# Altium PCB MainShunt.PcbDoc
Units mm, origin at the board's own origin, x right, y up, seen from the top; angles counter-clockwise.
Board outline 50 x 50.01 mm, 4 copper layers (Top Layer, Layer 1, Layer 2, Bottom Layer), stack 0.637 mm thick; 90 components, 101 nets, 247 pads, 12 vias.
Unrouted connection lines stored in the file: 141.
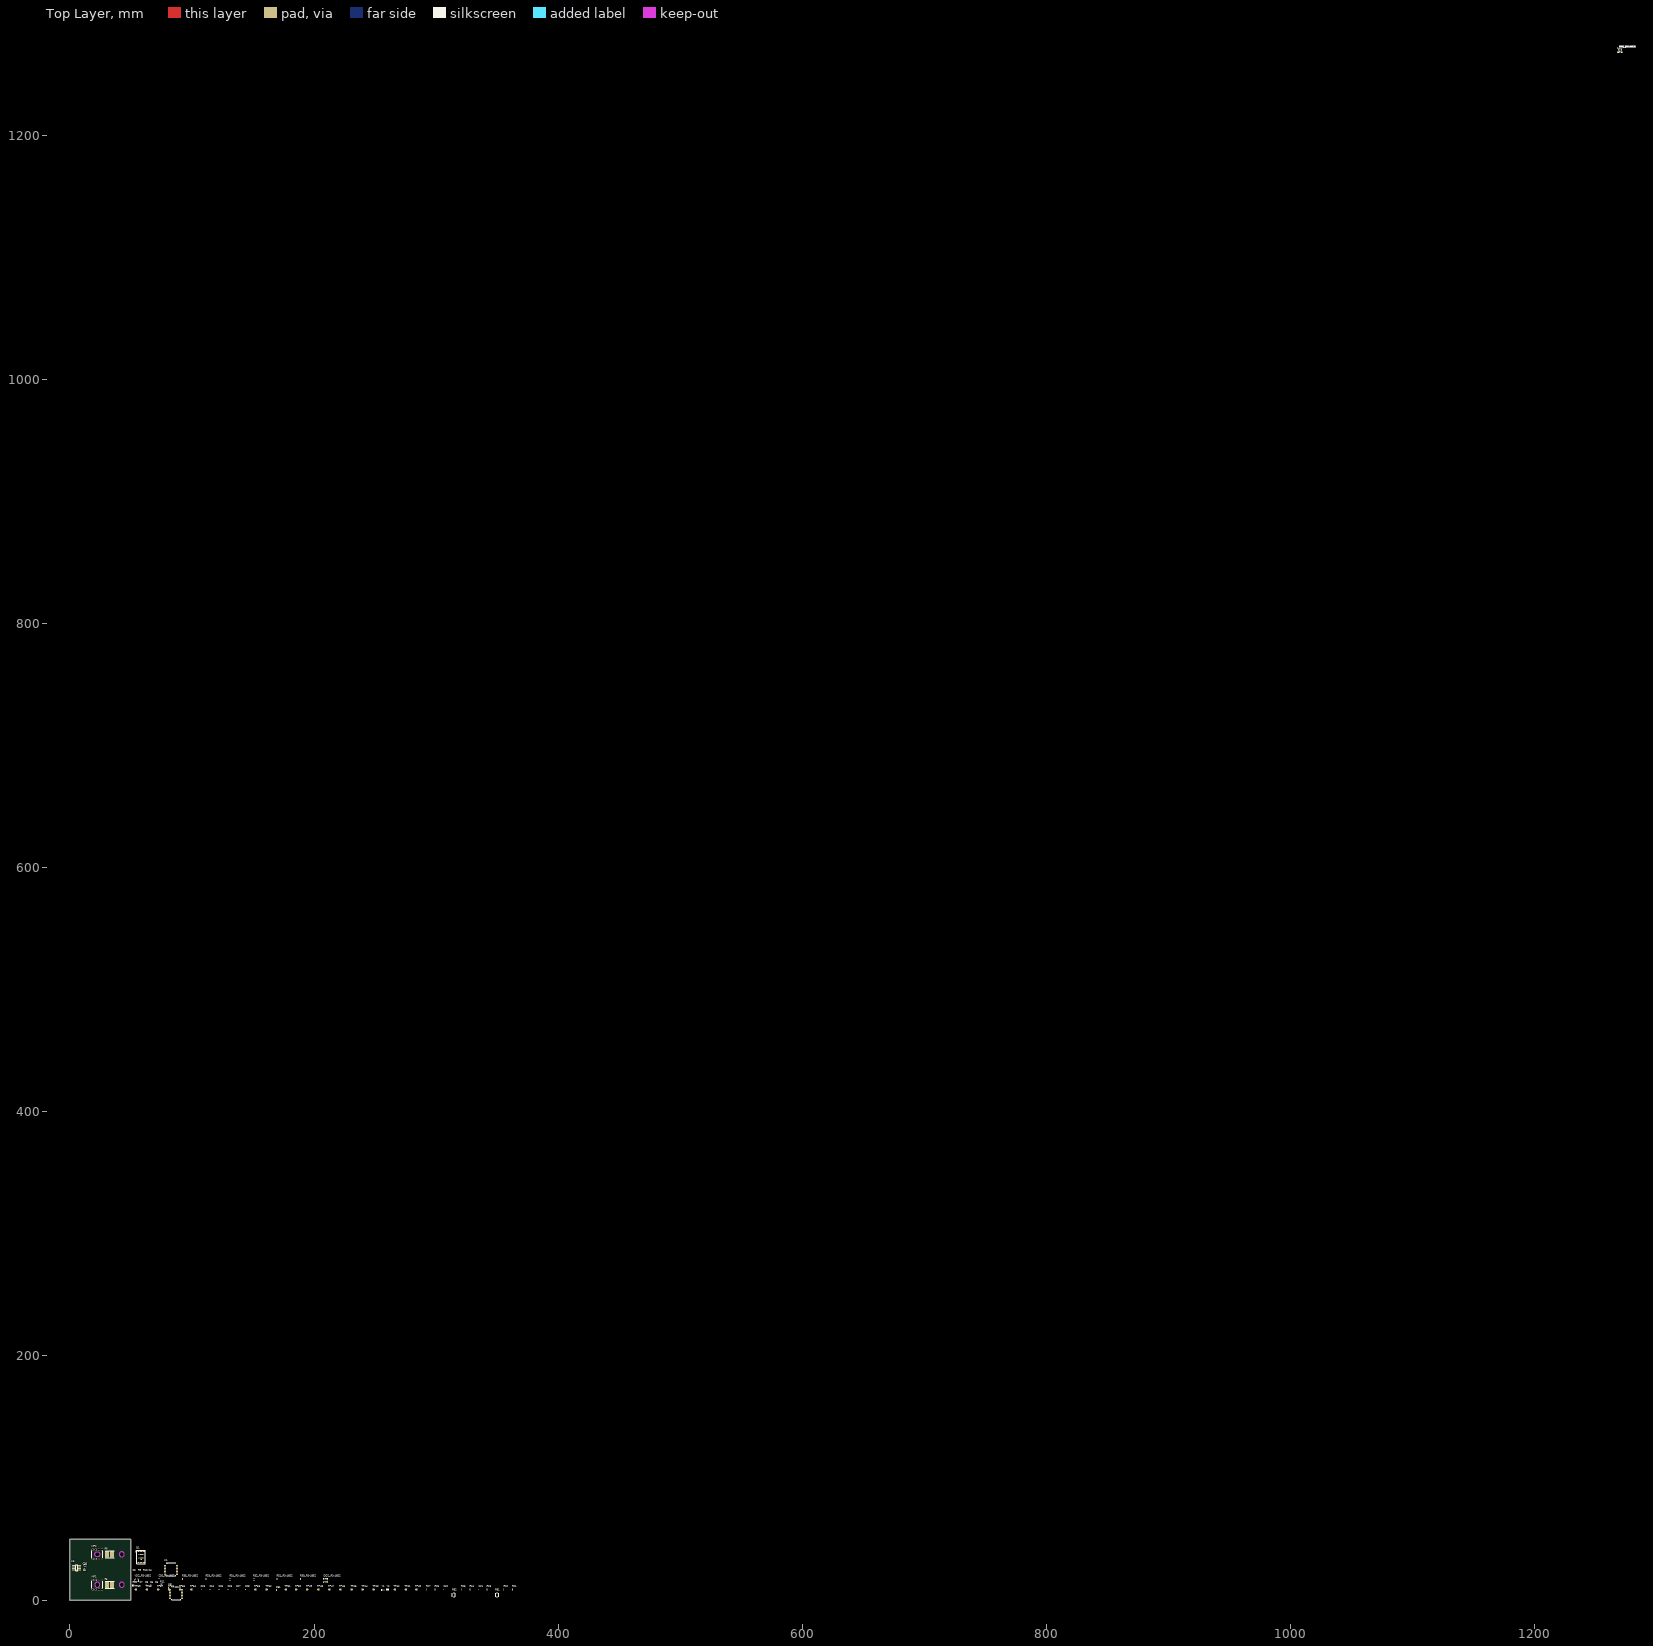
[diagram p0: Top Layer view]
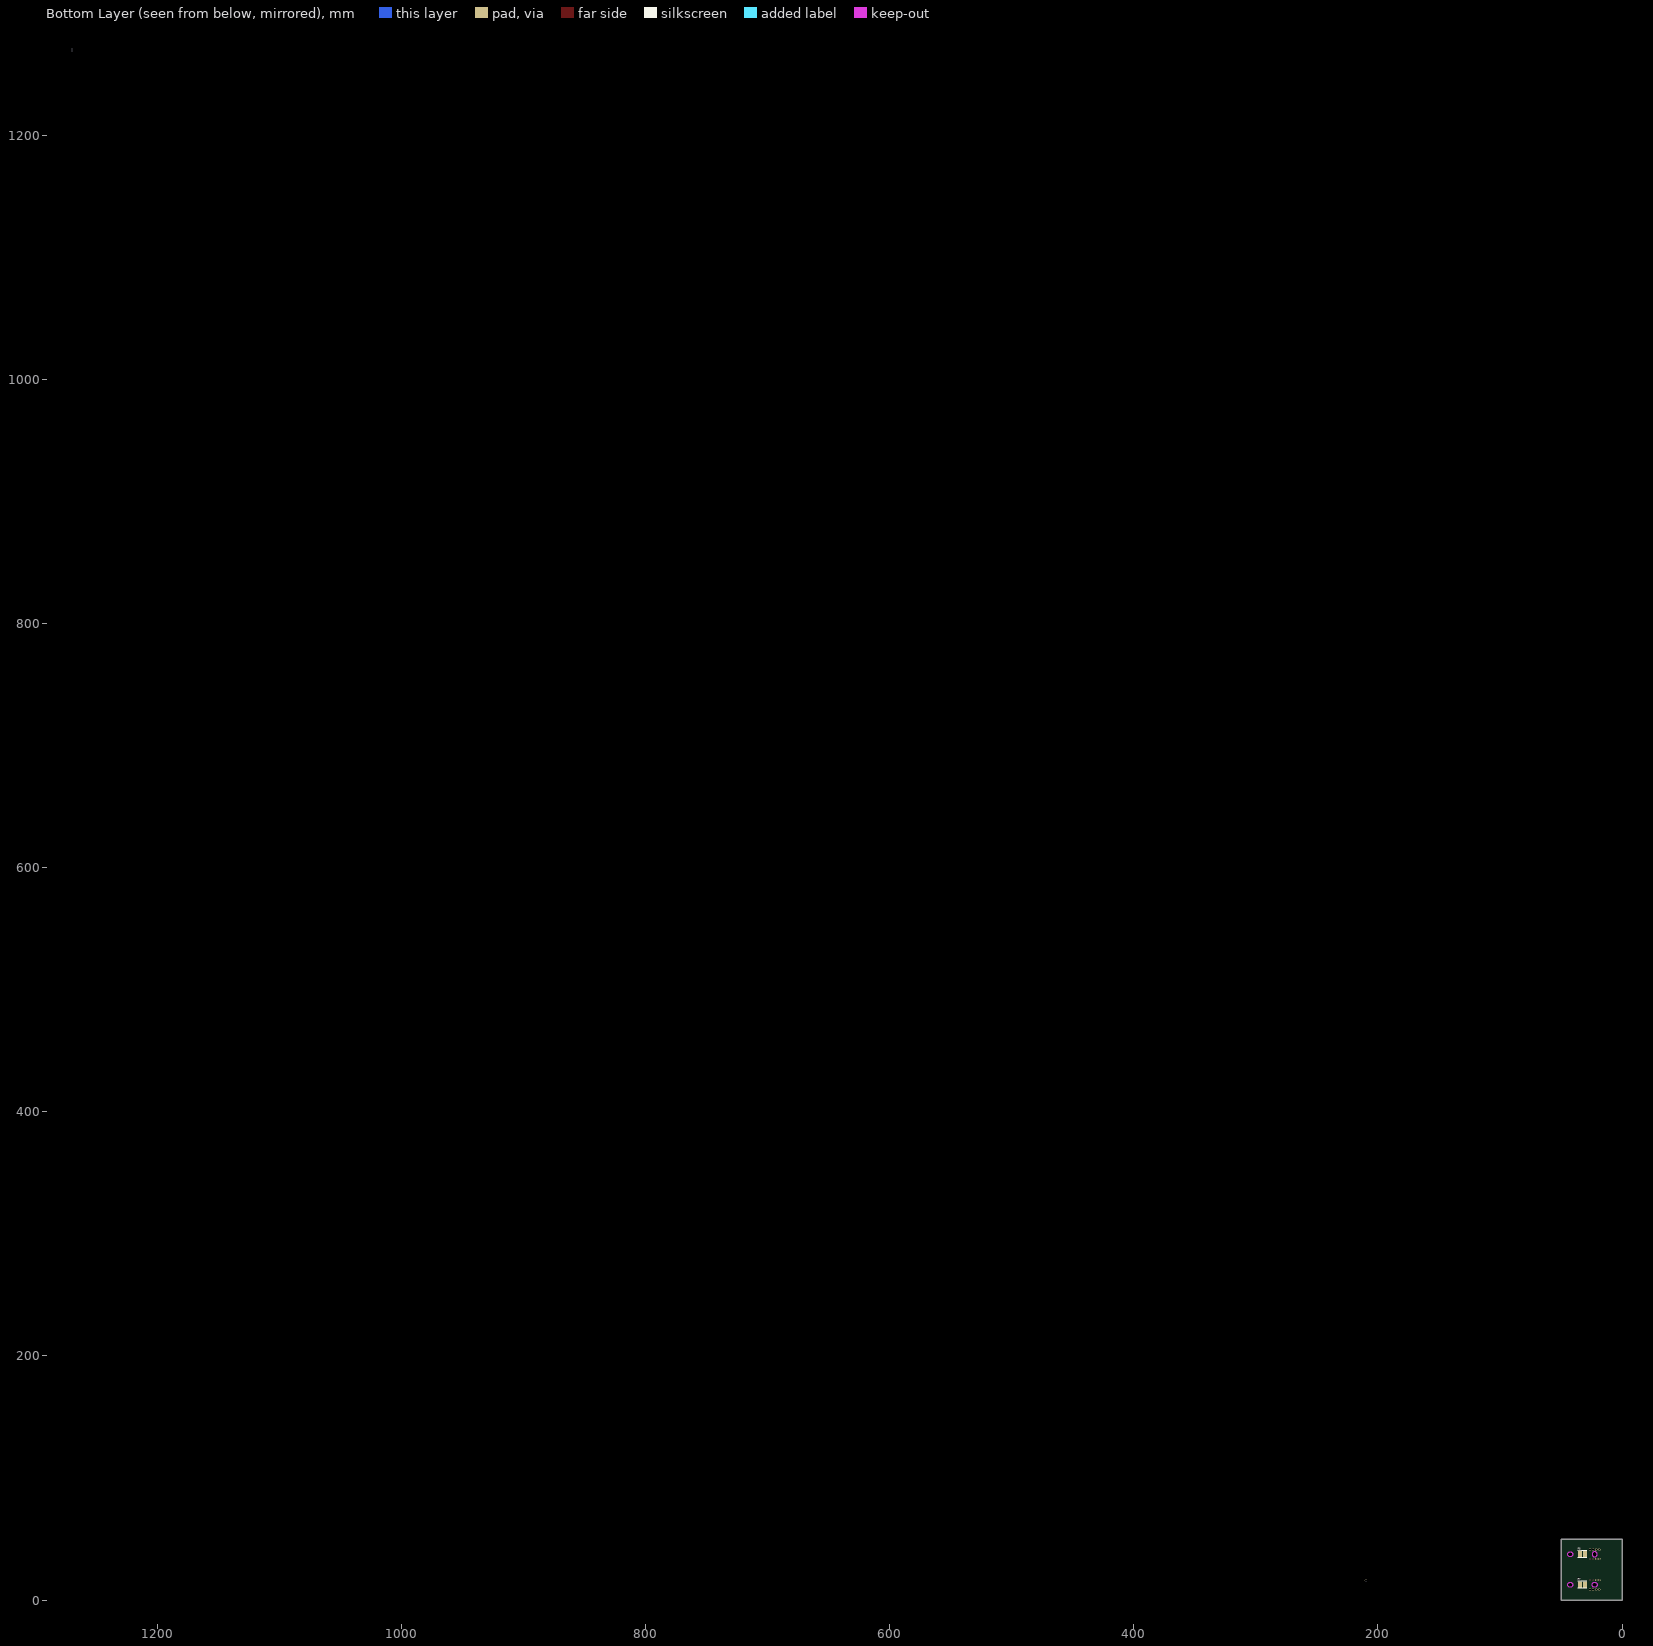
[diagram p1: Bottom Layer view, seen from below]

## Layer stack, top to bottom
Top Solder: solder mask 0.0102, Solder Resist, Dk 3.5
Top Layer: signal copper 0.07
Dielectric 2: prepreg 0.0711, PP-006, Dk 4.1
Layer 1: signal copper 0.0175
Dielectric 1: dielectric 0.32, FR-4, Dk 4.8
Layer 2: signal copper 0.0175
Dielectric 3: prepreg 0.0711, PP-006, Dk 4.1
Bottom Layer: signal copper 0.07
Bottom Solder: solder mask 0.0102, Solder Resist, Dk 3.5

## Board outline
0,0 50.004,0 50.004,50.005 0,50.005
cut-out: 40.425,12.5 ccw(c42.5,12.5) 42.5,10.425 ccw(c42.5,12.5) 44.575,12.5 ccw(c42.5,12.5) 42.5,14.575 ccw(c42.5,12.5)
cut-out: 40.425,37.5 ccw(c42.5,37.5) 42.5,35.425 ccw(c42.5,37.5) 44.575,37.5 ccw(c42.5,37.5) 42.5,39.575 ccw(c42.5,37.5)
cut-out: 22.5,35.425 cw(c22.5,37.5) 20.425,37.5 cw(c22.5,37.5) 22.5,39.575 cw(c22.5,37.5) 24.575,37.5 cw(c22.5,37.5)
cut-out: 20.425,12.5 ccw(c22.5,12.5) 22.5,10.425 ccw(c22.5,12.5) 24.575,12.5 ccw(c22.5,12.5) 22.5,14.575 ccw(c22.5,12.5)
cut-out: 20.425,12.5 ccw(c22.5,12.5) 22.5,10.425 ccw(c22.5,12.5) 24.575,12.5 ccw(c22.5,12.5) 22.5,14.575 ccw(c22.5,12.5)

## Design rules (kind name [scope] priority, off if disabled: settings)
Clearance [All] p1: gap=0.254 ignorepadtopadclearanceinfootprint=FALSE except(0: Arc-Hole Track-Hole SMDPad-Hole THPad-Hole Via-Hole Fill-Hole Poly-Hole Region-Hole Text-Hole)
PolygonConnect [All] p1: connectstyle=Relief reliefconductorwidth=0.254 reliefentries=4 polygonreliefangle="90 Angle" airgapwidth=0.254
RoomDefinition MainShunt [InComponentClass('MainShunt')] p1: confinementstyle=ConfineIn formatcopy=TRUE lockcomponents=FALSE outline 0,0 50.8,0 50.8,25.4 0,25.4
RoutingVias [All] p1: holewidth=0.711 width=1.27 viastyle="Through Hole" minholewidth=0.711 minwidth=1.27 maxholewidth=0.711 maxwidth=1.27
SolderMaskExpansion [All] p1: expansion=0.102 istentingtop=FALSE
SupplyNets "Schematic Supply Nets_5" [InNet('ISO_GND')] p1: voltage=0.000
SupplyNets "Schematic Supply Nets_4" [InNet('5V')] p2: voltage=0.000
SupplyNets "Schematic Supply Nets_3" [InNet('GND')] p3: voltage=0.000
SupplyNets "Schematic Supply Nets_2" [InNet('ISO_5V')] p4: voltage=0.000
SupplyNets "Schematic Supply Nets_1" [InNet('24V')] p5: voltage=0.000
SupplyNets "Schematic Supply Nets" [InNet('3V3')] p6: voltage=0.000
Width [All] p1: maxlimit=0.254 minlimit=0.254 preferedwidth=0.254
30 further rules are at their usual default settings.

## Classes and differential pairs
channel class RS-485_SN65HVD72DRBR: RS-4851 RS-4852 RS-4853
component class Vref-2v5: C22 C23 C24 C25 C26 C27 TP40 TP41 TP42 U3 U4
component class RS-4853: C28_RS-4853 C35_RS-4853 DD2_RS-4853 R19_RS-4853 R20_RS-4853 R21_RS-4853 R22_RS-4853 R23_RS-4853 R24_RS-4853 R30_RS-4853 R31_RS-4853 R32_RS-4853 R33_RS-4853 R34_RS-4853 R35_RS-4853 VD2_RS-4853
component class RS-4852: C28_RS-4852 C35_RS-4852 DD2_RS-4852 R19_RS-4852 R20_RS-4852 R21_RS-4852 R22_RS-4852 R23_RS-4852 R24_RS-4852 R30_RS-4852 R31_RS-4852 R32_RS-4852 R33_RS-4852 R34_RS-4852 R35_RS-4852 VD2_RS-4852
component class RS-4851: C28_RS-4851 C35_RS-4851 DD2_RS-4851 R19_RS-4851 R20_RS-4851 R21_RS-4851 R22_RS-4851 R23_RS-4851 R24_RS-4851 R30_RS-4851 R31_RS-4851 R32_RS-4851 R33_RS-4851 R34_RS-4851 R35_RS-4851 VD2_RS-4851
component class MCU: C21 C22 C23 C24 C25 C26 C27 C28 C29 C30 C31 C32 C33 C34 C35 FB1 PB1 PB2 R21 R22 R23 R24 R25 R26 R27 R28 R29 R30 R31 R32 R33 TP40 TP41 TP42 TP43 TP44 TP45 TP46 TP47 TP48 TP49 TP50 TP51 TP52 TP53 TP54 TP55 TP56 TP57 TP58 TP59 TP60 TP61 TP62 TP63 TP64 Y1 Y2
component class ISO_5V: C18 C19 C20 C21 R17 R18 U1
component class ADC: C36 U5
component class LDO_3V3: C7 C8 R9 R10 R11 R12
component class MainShunt: C1 C2 MP1 MP2 Q1 R5 R6 R7 R8

## Components (designator, comment, footprint, x,y, rotation, side; value= is the part's Value field where it differs from the comment)
C1 "1nF" FP-GRM155-0_05-IPC_C 11.474,22.352 r0 top
C2 "1nF" FP-GCM188-0_1-IPC_B 11.726,25.146 r270 top
C3 "1uF" CAPC0603X33N 52.07,22.352 r0 top
C4 "0.1uF" CAPC0603X33N 65.024,22.352 r0 top
C5 "0.1uF" CAPC1005X70N 66.548,12.446 r0 top
C6 "1uF" CAPC0603X33N 70.612,12.446 r0 top
C7 "0.1uF" CAPC0603X33N 57.658,12.446 r0 top
C8 "10uF" CAPC1005X70N 62.23,12.446 r0 top
C21 "0.1uF" C_CERAMIC_0402_HI 335.026,8.89 r90 top
C22 "0.1uF" C_CERAMIC_0402_HI 306.324,8.89 r90 top
C23 "0.1uF" C_CERAMIC_0402_HI 107.569,8.89 r90 top
C24 "10uF" C_CERAMIC_0402_HI 114.808,8.89 r90 top
C25 "0.1uF" C_CERAMIC_0402_HI 122.047,8.89 r90 top
C26 "10uF" C_CERAMIC_0402_HI 129.413,8.89 r90 top
C27 "10nF" C_CERAMIC_0402_HI 136.652,8.89 r90 top
C28 "0.1uF" C_CERAMIC_0402_HI 143.891,8.89 r90 top
C35_RS-4851 "0.1uF" C_CERAMIC_0402_HI 1269.987,1269.987 r0 top (schematic designator C35)
C35_RS-4852 "0.1uF" C_CERAMIC_0402_HI 72.898,17.399 r90 top (schematic designator C35)
C35_RS-4853 "0.1uF" C_CERAMIC_0402_HI 1269.987,1269.987 r0 top (schematic designator C35)
C36 "0.1uF" C_CERAMIC_0402_HI 11.512,27.686 r0 top
DD2_RS-4851 "SN65HVD72DRBR" TI-SON8-65P300X100_HS 1269.987,1269.987 r0 top (schematic designator DD2)
DD2_RS-4852 "SN65HVD72DRBR" TI-SON8-65P300X100_HS 209.677,16.129 r90 top (schematic designator DD2)
DD2_RS-4853 "SN65HVD72DRBR" TI-SON8-65P300X100_HS 1269.987,1269.987 r0 top (schematic designator DD2)
FB1 "BLM15AX102SN1D" BLM15xxxxxSN1x_MED 169.291,8.128 r90 top value="1 kOhms @ 100MHz"
MP1 "7460307" "7460307_CHEMICAL SURFACE" 22.5,12.5 r0 top
MP2 "7460307" "7460307_CHEMICAL SURFACE" 22.5,37.5 r0 top
PB1 "DS1042-24-2017VBR16005" DS1042-24-2017VB 350.012,4.191 r90 top
PB2 "DS1042-24-2017VBR16005" DS1042-24-2017VB 314.579,4.191 r90 top
Q1 "AUIRF7799L2" DIRECTFET-L8-V 58.293,35.306 r0 top
R5 "2mOhm 1%, 2818" FP-WSHP2818-MFG 32.5,12.5 r0 top
R6 "2mOhm 1%, 2818" FP-WSHP2818-MFG 32.5,37.5 r0 top
R7 "2mOhm 1%, 2818" FP-WSHP2818-MFG 32.5,12.5 r180 bottom
R8 "2mOhm 1%, 2818" FP-WSHP2818-MFG 32.5,37.5 r180 bottom
R9 "22k" RESC1005X40X25LL05T05 56.388,22.352 r0 top
R10 "160k" RESC1005X40X25LL05T05 60.706,22.352 r0 top
R11 "68k" FP-ERJ1GN-IPC_A 74.903,12.827 r0 top
R12 "2.2k" FP-ERJ1GN-IPC_A 52.07,11.938 r90 top
R21 "10k" R_ANY_CHIP_0402_MED 362.712,8.763 r90 top
R22 "0" R_ANY_CHIP_0402_MED 355.473,8.763 r90 top
R23 "0" R_ANY_CHIP_0402_MED 341.757,8.763 r90 top
R24 "0" R_ANY_CHIP_0402_MED 327.787,8.763 r90 top
R25 "10k" R_ANY_CHIP_0402_MED 320.675,8.763 r90 top
R26 "0" R_ANY_CHIP_0402_MED 299.085,8.763 r90 top
R27 "0" R_ANY_CHIP_0402_MED 291.973,8.763 r90 top
R30_RS-4851 "10k" R_ANY_CHIP_0402_MED 1269.987,1269.987 r0 top (schematic designator R30)
R30_RS-4852 "10k" R_ANY_CHIP_0402_MED 188.976,17.272 r90 top (schematic designator R30)
R30_RS-4853 "10k" R_ANY_CHIP_0402_MED 1269.987,1269.987 r0 top (schematic designator R30)
R31_RS-4851 "10k" R_ANY_CHIP_0402_MED 1269.987,1269.987 r0 top (schematic designator R31)
R31_RS-4852 "10k" R_ANY_CHIP_0402_MED 169.799,17.272 r90 top (schematic designator R31)
R31_RS-4853 "10k" R_ANY_CHIP_0402_MED 1269.987,1269.987 r0 top (schematic designator R31)
R32_RS-4851 "10" R_ANY_CHIP_0603_MED 1269.987,1269.987 r0 top (schematic designator R32)
R32_RS-4852 "10" R_ANY_CHIP_0603_MED 150.749,16.764 r90 top (schematic designator R32)
R32_RS-4853 "10" R_ANY_CHIP_0603_MED 1269.987,1269.987 r0 top (schematic designator R32)
R33_RS-4851 "10k" R_ANY_CHIP_0402_MED 1269.987,1269.987 r0 top (schematic designator R33)
R33_RS-4852 "10k" R_ANY_CHIP_0402_MED 111.633,17.272 r90 top (schematic designator R33)
R33_RS-4853 "10k" R_ANY_CHIP_0402_MED 1269.987,1269.987 r0 top (schematic designator R33)
R34_RS-4851 "10" R_ANY_CHIP_0603_MED 1269.987,1269.987 r0 top (schematic designator R34)
R34_RS-4852 "10" R_ANY_CHIP_0603_MED 131.318,16.764 r90 top (schematic designator R34)
R34_RS-4853 "10" R_ANY_CHIP_0603_MED 1269.987,1269.987 r0 top (schematic designator R34)
R35_RS-4851 "10k" R_ANY_CHIP_0402_MED 1269.987,1269.987 r0 top (schematic designator R35)
R35_RS-4852 "10k" R_ANY_CHIP_0402_MED 92.329,17.272 r90 top (schematic designator R35)
R35_RS-4853 "10k" R_ANY_CHIP_0402_MED 1269.987,1269.987 r0 top (schematic designator R35)
TP40 "LED_LINK" TP_SMD_2mm 283.845,8.636 r90 top
TP41 "LED_LINK" TP_SMD_2mm 275.336,8.636 r90 top
TP42 "LED_LINK" TP_SMD_2mm 266.192,8.636 r90 top
TP43 "LED_LINK" TP_SMD_2mm 248.793,8.636 r90 top
TP44 "LED_LINK" TP_SMD_2mm 239.776,8.636 r90 top
TP45 "LED_LINK" TP_SMD_2mm 230.759,8.636 r90 top
TP46 "LED_LINK" TP_SMD_2mm 221.615,8.636 r90 top
TP47 "LED_LINK" TP_SMD_2mm 212.598,8.636 r90 top
TP48 "LED_LINK" TP_SMD_2mm 203.581,8.636 r90 top
TP49 "LED_LINK" TP_SMD_2mm 194.437,8.636 r90 top
TP50 "LED_LINK" TP_SMD_2mm 185.42,8.636 r90 top
TP51 "LED_LINK" TP_SMD_2mm 176.911,8.636 r90 top
TP52 "LED_LINK" TP_SMD_2mm 161.163,8.636 r90 top
TP53 "LED_LINK" TP_SMD_2mm 152.019,8.636 r90 top
TP54 "LED_LINK" TP_SMD_2mm 99.441,8.636 r90 top
TP55 "LED_LINK" TP_SMD_2mm 90.297,8.636 r90 top
TP56 "LED_LINK" TP_SMD_2mm 81.28,8.636 r90 top
TP57 "LED_LINK" TP_SMD_2mm 72.263,8.636 r90 top
TP58 "LED_LINK" TP_SMD_2mm 63.119,8.636 r90 top
TP59 "LED_LINK" TP_SMD_2mm 54.102,8.636 r90 top
U1 "UCC12040DVER" FP-DVE0016A-MFG 82.882,25.273 r0 top
U3 "OPA350UA" FP-DVE0016A-MFG 87.047,5.6 r0 top
U5 "ADS1252U" TI-D8_M 5.461,26.416 r180 top
VD2_RS-4851 "SM712.TCT" SOT-23_MED 1269.987,1269.987 r0 top (schematic designator VD2)
VD2_RS-4852 "SM712.TCT" SOT-23_MED 54.737,16.256 r90 top (schematic designator VD2)
VD2_RS-4853 "SM712.TCT" SOT-23_MED 1269.987,1269.987 r0 top (schematic designator VD2)
Y1 "ECS-TXO-2016-33-160-TR" FP-TXO-2016-MFG 256.667,8.763 r0 top
Y2 "SIT1552AC-JE-DCC-32.768D" FP-SiT1552-J-MFG 260.477,8.763 r0 top

## Footprints (in the part's own frame and the unit in brackets; to place one, negate y for a bottom-side part, rotate by r counter-clockwise, add the part's x,y. Pads: shape width x height; smd on the part's side, far side on the other; paste and mask are expansions set on the pad)
"7460307_CHEMICAL SURFACE" [mm] "WP-BUTR Bushes with two Rows Pin-Plate, M4, blind thr 6mm"
  round 1.8 hole 1.475: 1(-3.81,-3.81) 1(-3.81,3.81) 1(-1.27,-3.81) 1(-1.27,3.81) 1(1.27,-3.81) 1(1.27,3.81) 1(3.81,-3.81) 1(3.81,3.81)
  silkscreen extent -4.5,-2.8 4.5,2.8, body extent -4.5,-4.5 4.5,4.5, height 7
BLM15xxxxxSN1x_MED [mm]
  rrect15% 0.59x0.62 smd mask+0.05: 1(-0.455,0) 2(0.455,0)
  body extent -0.52,-0.27 0.53,0.28, height 0.55
C_CERAMIC_0402_HI [mm]
  rrect15% 0.56x0.52 smd mask+0.05: 1(-0.39,0) 2(0.39,0)
  body extent -0.52,-0.27 0.53,0.28, height 0.55
CAPC0603X33N [mm]
  rect 0.46x0.42 smd: 1(-0.33,0) 2(0.33,0)
  body extent -0.3,-0.15 0.3,0.15, height 0.33
CAPC1005X70N [mm]
  rect 0.6x0.62 smd: 1(-0.46,0) 2(0.46,0)
  body extent -0.5,-0.25 0.5,0.25, height 0.5
DIRECTFET-L8-V [mm]
  rect 1.7x1.1 smd paste-0.1 mask+0: 1(-2.2,4.5) 2(0,4.5) 3(2.2,4.5) 13(-2.2,-4.5) 14(0,-4.5) 15(2.2,-4.5)
  rect 0.85x1.1 smd paste-0.6 mask+0: 4(-1.725,1.95) 5(-0.575,1.95) 6(0.575,1.95) 7(1.725,1.95) 8(-1.725,-0.85) 9(-0.575,-0.85) 10(0.575,-0.85) 11(1.725,-0.85)
  rect 1.3x0.7 smd paste-0.4 mask+0: 12(0,-2.25)
  silkscreen extent -4.22,-5.5 3.5,5.5, body extent -3.49,-4.55 3.49,4.55, height 0.75
DS1042-24-2017VB [mm]
  rrect15% 0.8x1.7 smd mask+0.05: 1(-1.7,0) 2(1.7,0)
  silkscreen extent -1.5,-1.25 1.5,1.25, body extent -2,-1.25 2,1.25, height 1.6
FP-DVE0016A-MFG [mm]
  rrect17% 1.65x0.6 smd paste+0 mask+0: 1(-4.875,4.445) 2(-4.875,3.175) 3(-4.875,1.905) 4(-4.875,0.635) 5(-4.875,-0.635) 6(-4.875,-1.905) 7(-4.875,-3.175) 8(-4.875,-4.445) 9(4.875,-4.445) 10(4.875,-3.175) 11(4.875,-1.905) 12(4.875,-0.635) 13(4.875,0.635) 14(4.875,1.905) 15(4.875,3.175) 16(4.875,4.445)
  silkscreen extent -3.8,-5.25 3.8,5.25, body extent -5.8,-5.5 5.8,5.5, height 0.25
FP-ERJ1GN-IPC_A [mm]
  rect 0.554x0.463 smd paste+0 mask+0: 1(-0.354,0) 2(0.354,0)
  silkscreen extent -0.63,-0.63 0.63,0.63, body extent -0.83,-0.43 0.83,0.43, height 0.25
FP-GCM188-0_1-IPC_B [mm]
  rect 0.959x0.912 smd paste+0 mask+0: 1(-0.727,0) 2(0.727,0)
  body extent -1.46,-0.71 1.46,0.71, height 0.25
FP-GRM155-0_05-IPC_C [mm]
  rect 0.515x0.472 smd paste+0 mask+0: 1(-0.379,0) 2(0.379,0)
  body extent -0.74,-0.38 0.74,0.38, height 0.25
FP-SiT1552-J-MFG [mm]
  round 0.25 smd paste+0 mask-1000: 1(-0.5,-0.205) 2(0.5,-0.205) 3(0.5,0.205) 4(-0.5,0.205)
  silkscreen extent -1.22,-0.51 0.89,0.51, body extent -1.29,-0.94 1.29,0.94, height 0.25
FP-TXO-2016-MFG [mm]
  rect 0.8x0.7 smd paste+0 mask+0: 1(-0.65,-0.5) 2(0.65,-0.5) 3(0.65,0.5) 4(-0.65,0.5)
  silkscreen extent -1.48,-0.59 -1.32,-0.43, body extent -1.15,-0.89 1.15,1.01, height 0.25
FP-WSHP2818-MFG [mm]
  rect 3.5x5.1 smd paste+0 mask+0: 1(-2.055,0) 2(2.055,0)
  silkscreen extent -3.69,-2.94 3.67,2.95, body extent -3.91,-2.65 3.91,2.65, height 0.25
R_ANY_CHIP_0402_MED [mm]
  rrect15% 0.6x0.55 smd mask+0.05: 1(-0.425,0) 2(0.425,0)
  body extent -0.52,-0.27 0.53,0.28, height 0.4
R_ANY_CHIP_0603_MED [mm]
  rrect15% 0.85x0.9 smd mask+0.05: 1(-0.775,0) 2(0.775,0)
  body extent -0.85,-0.45 0.85,0.45, height 0.55
RESC1005X40X25LL05T05 [mm] "Chip Resistor, 2-Leads, Body 1.05x0.55mm, IPC High Density"
  rect 0.45x0.45 smd: 1(-0.4,0) 2(0.4,0)
  body extent -0.53,-0.28 0.53,0.28, height 0.4
SOT-23_MED [mm]
  rrect15% 0.9x0.6 smd mask+0.05: 1(1.1,-0.95) 2(1.1,0.95) 3(-1.1,0)
  silkscreen extent -0.7,-1.5 0.2,1.5, body extent -1.25,-1.5 1.25,1.5, height 1.1
TI-D8_M [mm]
  oval 2.5x0.7 smd: 1(-2.45,1.905) 2(-2.45,0.635) 3(-2.45,-0.635) 4(-2.45,-1.905) 5(2.45,-1.905) 6(2.45,-0.635) 7(2.45,0.635) 8(2.45,1.905)
  silkscreen extent -0.8,-2.5 0.8,2.5, body extent -2,-2.5 2,2.5, height 1.75
TI-SON8-65P300X100_HS [mm]
  rrect15% 0.7x0.35 smd mask+0.05: 1(-1.395,0.975) 2(-1.395,0.325) 3(-1.395,-0.325) 4(-1.395,-0.975) 5(1.395,-0.975) 6(1.395,-0.325) 7(1.395,0.325) 8(1.395,0.975)
  rrect5% 1.65x2.4 smd paste-1.2 mask+0.05: 9(0,0)
  silkscreen extent -2.15,-1.7 1.7,1.75, body extent -1.65,-1.55 1.65,1.55, height 1
TP_SMD_2mm [mm]
  round 2 smd paste-2 mask+0.05: 1(0,0)
  body extent -1,-1 0.99,1, height 0.1

## Part data
C1 C2: "1nF 2000V X7R ±10% 1206 Ceramic Capacitor RoHS", Dielectric Type=X7R, Manufacturer=Yageo, Package=1206, Part Number=CC1206KKX7RDBB102, Supplier Part Number 1=311-1487-2-ND, Temperature Range="-55°C ~ 125°C", Tolerance=±10%, Voltage=2000V, Component Type=SMD, ComponentLink1Description=Datasheet, ComponentLink1URL=https://www.yageo.com/upload/media/product/products/datasheet/mlcc/UPY-NP0X7R_HV_1KV-to-3KV_11.pdf, Part Type="Ceramic / X7R / 1206", Replacement=NONE, Supplier 1=Digi-Key
C3 C6: "1uF 25V Х5R ±10% 0402 Ceramic Capacitor RoHS", Dielectric Type=X5R, Manufacturer="Murata Electronics", Package=0402, Part Number=GRM155R61E105KA12D, Supplier Part Number 1=490-10017-1-ND, Temperature Range="-55°C ~ 85°C", Tolerance=±10%, Voltage=25V, Component Status=Released, Component Type=SMD, ComponentLink1Description=Datasheet, ComponentLink1URL=https://search.murata.co.jp/Ceramy/image/img/A01X/G101/ENG/GRM155R61E105KA12-01.pdf, Part Type="Ceramic / X5R / 0402", Price=0.0033, Replacement=NONE, Standard Lead Time="15 Weeks", Supplier 1=Digi-Key
  C6: Ajax_1C_ID=20895, Ajax_1C_PN="1uF 25V Х5R 10% 0402 GRM155R61E105KA12D Murata Ceramic Capacitor SMD RoHS", Ajax_1С_Status="Mass Production", GUID_1C=a74143f5-b173-11ea-ab61-0050569f2651
C4 C5: "100nF 25V X5R ±10% 0402 Ceramic Capacitor RoHS", Dielectric Type=X5R, Manufacturer="Samsung Electro-Mechanics", Package=0402, Part Number=CL05A104KA5NNNC, Supplier Part Number 1=187-CL05A104KA5NNNC, Temperature Range="-55°C ~ 85°C", Tolerance=±10%, Voltage=25V, Ajax_1C_ID=27170, Ajax_1C_PN="100nF 25V X5R 10% 0402 CL05A104KA5NNNC Ceramic Capacitor SMD RoHS", Ajax_1С_Status="Mass Production", Component Status=Released, Component Type=SMD, ComponentLink1Description=Datasheet, ComponentLink1URL=https://eu.mouser.com/datasheet/2/585/MLCC-1837944.pdf, GUID_1C=6c9121f0-7733-11eb-ab70-0050569f2651, Part Type="Ceramic / X5R / 0402", Price=0.0013, Replacement=NONE, Standard Lead Time="38 Weeks", Supplier 1=Mouser
C7: "100nF 50V X7R ±10% 0603 Ceramic Capacitor RoHS", Dielectric Type=X7R, Manufacturer="Samsung Electro-Mechanics", Package=0603, Part Number=CL10B104KB8NNNC, Supplier Part Number 1=1276-1000-2-ND, Temperature Range="-55°C ~ 125°C", Tolerance=±10%, Voltage=50V, Component Status=Released, Component Type=SMD, ComponentLink1Description=Datasheet, ComponentLink1URL=https://media.digikey.com/pdf/Data%20Sheets/Samsung%20PDFs/CL_Series_MLCC_ds.pdf, Part Type="Ceramic / X7R / 0603", Price=0.00273, Replacement=CL10B104KB8NNND, Standard Lead Time="18 Weeks", Supplier 1=Digi-Key
C8: "10uF 35V X5R ±10% 1206 Ceramic Capacitor RoHS", Dielectric Type=X5R, Manufacturer="Murata Electronics", Package=1206, Part Number=GRM319R6YA106KA12D, Supplier Part Number 1=490-9964-1-ND, Temperature Range="-55°C ~ 85°C", Tolerance=±10%, Voltage=35V, Component Status=Released, Component Type=SMD, ComponentLink1Description=Datasheet, ComponentLink1URL=https://search.murata.co.jp/Ceramy/image/img/A01X/G101/ENG/GRM319R6YA106KA12-01.pdf, Part Type="Ceramic / X5R / 1206", Price=0.03648, Replacement=NONE, Standard Lead Time=NONE, Supplier 1=Digi-Key
C21 C22 C23 C25 C28 C35_RS-4851 C35_RS-4852 C35_RS-4853 C36: library part CL05A104KA5NNNC, "100nF 25V X5R ±10% 0402 Ceramic Capacitor RoHS", Dielectric Type=X5R, Manufacturer="Samsung Electro-Mechanics", Package=0402, Supplier Part Number 1=187-CL05A104KA5NNNC, Temperature Range="-55°C ~ 85°C", Tolerance=±10%, Voltage=25V, Component Status=Released, Component Type=SMD, ComponentLink1Description=Datasheet, ComponentLink1URL=https://eu.mouser.com/datasheet/2/585/MLCC-1837944.pdf, Part Number=CL05A104KA5NNNC, Part Type="Ceramic / X5R / 0402", Price=0.0013, Replacement=NONE, Standard Lead Time="38 Weeks", Supplier 1=Mouser
C24 C26: library part GRM155C80J106ME11D, "10uF 6.3V X6S ±20% 0402 Ceramic Capacitor RoHS", Dielectric Type=X6S, Manufacturer="Murata Electronics", Package=0402, Supplier Part Number 1=490-13233-1-ND, Temperature Range="-55°C ~ 105°C", Tolerance=±20%, Voltage=6.3V, Component Status=Released, Component Type=SMD, ComponentLink1Description=Datasheet, ComponentLink1URL=https://search.murata.co.jp/Ceramy/image/img/A01X/G101/ENG/GRM155C80J106ME11-01.pdf, Part Number=GRM155C80J106ME11D, Part Type="Ceramic / X6S / 0402", Price=0.01104, Replacement=NONE, Standard Lead Time="15 Weeks", Supplier 1=Digi-Key
C27: library part CL05B103KA5NNNC, "10nF 25V X7R ±10% 0402 Ceramic Capacitor RoHS", Dielectric Type=X7R, Manufacturer="Samsung Electro-Mechanics", Package=0402, Supplier Part Number 1=187-CL05B103KA5NNNC, Temperature Range="-55°C ~ 125°C", Tolerance=±10%, Voltage=25V, Component Status=Released, Component Type=SMD, ComponentLink1Description=Datasheet, ComponentLink1URL=https://eu.mouser.com/datasheet/2/585/MLCC-1837944.pdf, Part Number=CL05B103KA5NNNC, Part Type="Ceramic / X7R / 0402", Price=0.00145, Replacement=NONE, Standard Lead Time="28 Weeks", Supplier 1=Mouser
DD2_RS-4851 DD2_RS-4852 DD2_RS-4853: "3.3V 1/1 Transceiver Half RS422 Up to 250 kbps, RS485 With IEC ESD protection, SON-8", Manufacturer="Texas Instruments", Package=VDFN-8, Supplier Part Number 1=296-40520-2-ND, Temperature Range="-40°C ~ 125°C", Component Status=Released, Component Type=SMD, ComponentLink1Description=Datasheet, ComponentLink1URL=https://www.ti.com/lit/ds/symlink/sn65hvd72.pdf, Part Number=SN65HVD72DRBR, Part Type="Transceivers / RS-232/RS-422/RS-485", Price=0.709, Replacement=NONE, Standard Lead Time="16 Weeks", Supplier 1=Digi-Key
FB1: "1 kOhms @ 100MHz Ferrite Bead 0402, 350mA 490mOhm", Current=0.35A, Manufacturer="Murata Electronics", Package=0402, Saturation Current=NONE, Supplier Part Number 1=490-5442-2-ND, Temperature Range="-55°C ~ 125°C", Tolerance=±25%, Component Status=Released, Component Type=SMD, ComponentLink1Description=Datasheet, ComponentLink1URL=https://www.murata.com/en-us/products/productdata/8796740059166/ENFA0018.pdf, Part Number=BLM15AX102SN1D, Part Type="Ferrite Bead", Price=0.00265, Replacement=NONE, Standard Lead Time="7 Weeks", Supplier 1=Digi-Key
MP1 MP2: "7460307 8 Pin Power Element, Copper Zinc Alloy, 160A, M4, Vertical", Current Rating=160A, Max Operating Temperature=150°C, Min Operating Temperature=-55°C, Contact Material=Copper, Contact Plating=Tin, Height=10.5mm, Insulation=Non-Insulated, Length=9mm, Material=Brass, Mount="Through Hole", NexarPartId=18187384, Number of Contacts=8, Number of Pins=8, Number of Rows=2, Packaging=Bulk, REACH SVHC=Unknown, RoHS=Compliant, Termination=Press-Fit, Thread Size=M4, Width=9mm
PB1 PB2: "Tactile Switch 2.5x3mm, SMD, 160gf, Height 1.7mm, 50mA 12VDC", Manufacturer=Connfly, Temperature Range="-20°C ~ 70°C", Component Type=SMD, Part Number=DS1042-24-2017VBR16005, Part Type="Switch / Tactile", Replacement=NONE
Q1: "Insulated-Gate Field-Effect Transistor (IGFET), N-Channel / MOSFETs DirectFET 2 250V 35A 38mOhm Automotive", Manufacturer=Infineon, Package/Case=DirectFET-L8, Part Number=AUIRF7799L2TR, Supplier Part Number 1=942-AUIRF7799L2TR, ComponentLink1Description="New link", ComponentLink1URL=https://eu.mouser.com/datasheet/2/196/auirf7799l2-1730908.pdf, Id=35A, Max T="175 C", Mounting Style=SMD/SMT, Pd=125, Product Category=MOSFETs, Qg="110 nC", Rds On="32 mOhm", Supplier 1=Mouser, Transistor Polarity=N-Channel, Turn-Off Delay="73.9 ns", Turn-On Delay="36.3 ns", Vds=250V, Vgs="- 30 V, + 30 V", Vgs th="4 V"
R5 R6 R7 R8: "WSHP28182L000FEB Res Metal Strip 2818 0.002 Ohm 1% 10W ±200ppm/C Pad SMD Automotive T/R", Case/Package=2818, Max Operating Temperature=170°C, Min Operating Temperature=-65°C, Power Rating=10W, Resistance=2mΩ, Temperature Coefficient=200ppm/°C, Tolerance=1%, Composition="Metal Element", Height=3.43mm, NexarPartId=78727543, Packaging="Cut Tape", RoHS=Non-Compliant, Schedule B="8533210045, 8533210045"
R9: "22 kOhms ±1% 1/16W 0402 Thick Film Resistor", Manufacturer=Yageo, Package=0402, Part Number=RC0402FR-0722KL, Power Rating=0.062W, Temperature Range="-55°C ~ 155°C", Temperature Stability=±100ppm/°C, Tolerance=±1%, Voltage=50V, Component Status=Released, Component Type=SMD, ComponentLink1Description=Datasheet, ComponentLink1URL=https://eu.mouser.com/datasheet/2/447/PYu_RC_Group_51_RoHS_L_10-1664068.pdf, Part Type="Thick Film", Price=0,00065038, Replacement=NONE
R10: "160 kOhms ±1% 1/16W 0402 Thick Film Resistor", Manufacturer=Yageo, Package=0402, Part Number=RC0402FR-07160KL, Power Rating=0.062W, Temperature Range="-55°C ~ 155°C", Temperature Stability=±100ppm/°C, Tolerance=±1%, Voltage=50V, Component Status=Released, Component Type=SMD, ComponentLink1Description=Datasheet, ComponentLink1URL=https://eu.mouser.com/datasheet/2/447/PYu_RC_Group_51_RoHS_L_11-1984063.pdf, Part Type="Thick Film", Price=0,0005, Replacement=NONE
R11: "68 kOhms ±1% 1/16W 0402 Thick Film Resistor", Manufacturer=Yageo, Package=0402, Part Number=RC0402FR-0768KL, Power Rating=0.062W, Supplier Part Number 1=311-68.0KLRTR-ND, Temperature Range="-55°C ~ 155°C", Temperature Stability=±100ppm/°C, Tolerance=±1%, Voltage=50V, Component Status=Released, Component Type=SMD, ComponentLink1Description=Datasheet, ComponentLink1URL=https://eu.mouser.com/datasheet/2/447/PYu_RC_Group_51_RoHS_L_11-1984063.pdf, Part Type="Thick Film", Price=0,00065051, Replacement=NONE, Supplier 1=Digi-Key
R12: "2.2 kOhms ±1% 1/16W 0402 Thick Film Resistor", Manufacturer=Yageo, Package=0402, Part Number=RC0402FR-072K2L, Power Rating=0.062W, Temperature Range="-55°C ~ 155°C", Temperature Stability=±100ppm/°C, Tolerance=±1%, Voltage=50V, Component Status=Released, Component Type=SMD, ComponentLink1Description=Datasheet, ComponentLink1URL=https://eu.mouser.com/datasheet/2/447/PYu_RC_Group_51_RoHS_L_11-1984063.pdf, Part Type="Thick Film", Price=0,00065, Replacement=NONE
R21 R25 R30_RS-4851 R30_RS-4852 R30_RS-4853 R31_RS-4851 R31_RS-4852 R31_RS-4853 R33_RS-4851 R33_RS-4852 R33_RS-4853 R35_RS-4851 R35_RS-4852 R35_RS-4853: library part RC0402FR-0710KL, "10 kOhms ±1% 1/16W 0402 Thick Film Resistor", Manufacturer=Yageo, Package=0402, Power Rating=0.062W, Supplier Part Number 1=311-10.0KLRTR-ND, Temperature Range="-55°C ~ 155°C", Temperature Stability=±100ppm/°C, Tolerance=±1%, Voltage=50V, Component Status=Released, Component Type=SMD, ComponentLink1Description=Datasheet, ComponentLink1URL=https://eu.mouser.com/datasheet/2/447/PYu_RC_Group_51_RoHS_L_10-1664068.pdf, Part Number=RC0402FR-0710KL, Part Type="Thick Film", Price=0,00065, Replacement=NONE, Supplier 1=Digi-Key
R22 R23 R24 R26 R27: library part RC0402JR-070RL, "0 Ohms Jumper ±5% 1/16W 0402 Thick Film Resistor", Manufacturer=Yageo, Package=0402, Power Rating=0.062W, Supplier Part Number 1=311-0.0JRTR-ND, Temperature Range="-55°C ~ 155°C", Temperature Stability=NONE, Tolerance=±5%, Voltage=50V, Component Status=Released, Component Type=SMD, ComponentLink1Description=Datasheet, ComponentLink1URL=https://eu.mouser.com/datasheet/2/447/PYu_RC_Group_51_RoHS_L_10-1664068.pdf, Part Number=RC0402JR-070RL, Part Type="Thick Film", Price=0.00045, Replacement=NONE, Supplier 1=Digi-Key
R32_RS-4851 R32_RS-4852 R32_RS-4853 R34_RS-4851 R34_RS-4852 R34_RS-4853: library part RC0603JR-0710RL, "10 Ohms ±5%, 1/10W 0603 Thick Film Resistor", Manufacturer=Yageo, Package=0603, Power Rating=0.1W, Supplier Part Number 1=603-RC0603JR-0710RL, Temperature Range="-55°C ~ 155°C", Temperature Stability=±200ppm/°C, Tolerance=±5%, Voltage=75V, Component Status=Released, Component Type=SMD, ComponentLink1Description=Datasheet, ComponentLink1URL=https://eu.mouser.com/datasheet/2/447/Yageo_03_18_2021_PYu_RC_Group_51_RoHS_L_11-2199992.pdf, Part Number=RC0603JR-0710RL, Part Type="Thick Film", Price=0.0006, Replacement=NONE, Supplier 1=Mouser
TP40 TP41 TP42 TP43 TP44 TP45 TP46 TP47 TP48 TP49 TP50 TP51 TP52 TP53 TP54 TP55 TP56 TP57 TP58 TP59: library part TP-PAD-SMD, "Test Point SMD Pad 1.0mm/1.5mm/2mm", Temperature Range=NONE, Component Type=SMD, ComponentLink1Description=Datasheet, ComponentLink1URL=NONE, Part Number=TP-PAD-SMD, Part Type="Test Point", Replacement=NONE
U1: library part CMP-04910-000064-1, "DC DC CONVERTER 5V 500mW", Input Voltage - Max=5.5V, Input Voltage - Min=4.5V, Input Voltage, Nominal=5V, Isolation Voltage="3 kV", Output Power="500 mW", Package/Case=SOIC-16, Supplier Part Number 1=595-UCC12040DVER, ComponentLink1Description=Datasheet, ComponentLink1URL=https://www.ti.com/lit/ds/symlink/ucc12040.pdf?ts=1755529908774&ref_url=https%253A%252F%252Fwww.ti.com%252Fproduct%252FUCC12040, Mounting Style=SMD/SMT, Number of Outputs=1, Part Number=UCC12040DVER, Product Type="Isolated DC-DC Converters", Subcategory="DC-DC Converters", Supplier 1=Mouser, Unit Weight="5 g"
U3: library part TI-OPA-8_1, "High-Speed, Single-Supply, Rail-to-Rail Operational Amplifier MicroAmplifier(TM) Series, 2.7 to 5.5 V, -40 to 85 degC, 8-pin SOIC (D8), Green (RoHS & no Sb/Br)", Manufacturer="Texas Instruments", Total Supply Voltage(Max)(+5V is 5, +/-5V is 10)=5.5, Total Supply Voltage(Min)(+5V is 5, +/-5V is 10)=2.7, CMRR(Min)(dB)=66, Code_JEDEC=MS-012, ComponentLink1Description="Manufacturer URL", ComponentLink1URL=http://www.ti.com/, ComponentLink2Description=Datasheet, ComponentLink2URL=http://www.ti.com/general/docs/lit/getliterature.tsp?genericPartNumber=OPA350&fileType=pdf, ComponentLink3Description="Package Specification", ComponentLink3URL=http://www.ti.com/litv/pdf/msoi002j, DatasheetVersion=SBOS099C, Eco-Plan="Green (RoHS & no Sb/Br)", IIB(Max)(pA)=10, Iq per channel(Max)(mA)=8.5, Mounting Technology="Surface Mount", Number of Channels=1, Offset Drift(Typ)(uV/C)=4, PackageDescription="8-Pin Plastic Small Outline, Body 4.9 x 3.9 mm, Pitch 1.27 mm", PackageReference=D0008A, PackageVersion="4040047-3/M, 06/2011", PartNumber=OPA350UA, Slew Rate(Typ)(V/us)=22, Sub Family="Low Input Bias Current Amp (<=10pA), Low Offset Voltage Amplifier (<=500uV), Low Supply Voltage Amplifier (<=2.7V), Precision Amplifier", Vio (25C)(Max)(mV)=1, Vn at 1kHz(Typ)(nV/rtHz)=18
U5: library part CMP-0003-00072-2, "ResolutionPlus 24-Bit, 40 kHz ADC, -40 to 85 degC, 8-pin SOIC (D8), Green (RoHS & no Sb/Br)", Analog Voltage AV/DD(Max)(V)=5.25, Analog Voltage AV/DD(Min)(V)=4.75, Manufacturer="Texas Instruments", Supplier Part Number 1=595-ADS1252U, # Input Channels=1, Architecture=Delta-Sigma, Code_JEDEC=MS-012, ComponentLink1Description="Manufacturer URL", ComponentLink1URL=http://www.ti.com/, ComponentLink2Description=Datasheet, ComponentLink2URL=http://www.ti.com/general/docs/lit/getliterature.tsp?genericPartNumber=ADS1252&fileType=pdf, ComponentLink3Description="Package Specification", ComponentLink3URL=http://www.ti.com/litv/pdf/msoi002j, DatasheetVersion=SBAS127D, Digital Supply(Max)(V)=5.25, Digital Supply(Min)(V)=4.75, Eco-Plan="Green (RoHS & no Sb/Br)", INL(Max)(+/-LSB)=1, Interface="Serial SPI", Mounting Technology="Surface Mount", PackageDescription="8-Pin Plastic Small Outline, Body 4.9 x 3.9 mm, Pitch 1.27 mm", PackageReference=D8, PackageVersion="4040047-3/M, 06/2011", Part Number=ADS1252U, PartNumber=ADS1252U, Resolution(Bits)=24, Sample Rate (max)(SPS)=41k, SubFamily="Precision ADC (<=10MSPS)", Supplier 1=Mouser
VD2_RS-4851 VD2_RS-4852 VD2_RS-4853: "TVS Diode 26V and 19V Clamp, 21A and 38A (8/20us) Ipp, SOT-23", Current="21A, 38A", Manufacturer=Semtech, Package=SOT-23, Supplier Part Number 1=SM712TR-ND, Temperature Range="-55°C ~ 125°C", Voltage="13.3V, 7.5V", Component Status=Released, Component Type=SMD, ComponentLink1Description=Datasheet, ComponentLink1URL=https://semtech.my.salesforce.com/sfc/p/#E0000000JelG/a/440000001MKW/f6pBKheIN2CeR0DxWdS3THuJ7nh4aKYltSzghsLP5iw, Marking=712, Part Number=SM712.TCT, Part Type="TVS / ESD Protection", Price=0,25, Replacement=NONE, Standard Lead Time="2 Weeks", Supplier 1=Digi-Key
Y1: library part CMP-40224-000008-1, "XTAL OSC TCXO 16MHZ 3.3V SMD", Frequency=16MHz, Load Capacitance=15pF, Manufacturer=ECS, Max Supply Current=7mA, Max Supply Voltage=3.63V, Min Supply Voltage=2.97V, Package=TXO-2016, Supplier Part Number 1=520-TXO-2016-33-160T, Temperature="-40°C to +85°C", Temperature Range High=+85°C, Temperature Range Low=-40°C, Automotive=No, Category=Crys, ComponentLink2Description=Datasheet, ComponentLink2URL=https://ecsxtal.com/store/pdf/ECS-TXO-2016.pdf, Device Class L1="Passive Components", Device Class L2="Crystals / Oscillators", Device Class L3=Oscillators, Digikey Description="XTAL OSC TCXO 16MHZ 3.3V SMD", Height=0.8mm, Lead Free=Yes, Manufacturer Part Number=ECS-TXO-2016-33-160-TR, Octopart=https://octopart.com/ecs-txo-2016-33-160-tr-ecs+international-102811109, Part Number=ECS-TXO-2016-33-160-TR, RoHS=TRUE, Series=TXO-2016, Stability=2ppm, Supplier 1=Mouser
Y2: library part CMP-25159-260295-1, "MEMS OSC TCXO 32.7680KHZ LVCMOS", Frequency=32.768kHz, Frequency Stability=5ppm, Max Operating Temperature=70°C, Min Operating Temperature=0°C, Supplier Part Number 1=788-1552ACJEDCC32.7D, ComponentLink1Description=Datasheet, ComponentLink1URL=https://eu.mouser.com/datasheet/2/371/SiT1552_datasheet-1511133.pdf, Height=0.024inch, Length=0.061inch, Mount="Surface Mount", Packaging="Cut Tape", Part Number=SIT1552AC-JE-DCC-32.768D, RoHS Compliant=Yes, Series=SiT1552, Supplier 1=Mouser, Width=0.033inch

## Via types
v1: diameter 0.6, hole 0.3, Top Layer to Bottom Layer, 12 vias

## Nets (pads, with @x,y where several pads share a name; then routed paths per layer and width w, separated by ;. In a path a pad name is that pad's centre, name@x,y a point inside that pad or via, vN(x,y) a via of type N, cw(c..) or ccw(c..) an arc to the next point about the centre after c; other vN are vias at no path point)
3V3: C5.1 C6.1 R21.1 R22.2 R23.2 R25.1 Y1.1 Y1.4 Y2.3
5V: C3.1 C4.1 R10.1 U1.1 U1.3 U1.4
24V: C8.1 R9.1
cCell-1: 
cCell-2: 
cCell-3: 
cCell-4: 
cCell-5: 
cCell-6: 
cCell-7: 
Cell-1: 
Cell-2: 
Cell-3: 
Cell-4: 
Cell-5: 
Cell-6: 
Cell-7: 
Cell-GND: 
FB: R10.2
GND: C1.2 C2.2 C3.2 C4.2 C5.2 C6.2 C8.2 C21.2 C22.2 PB1.1 PB2.1 R12.2 R26.1 R27.1 U1.2 U1.6 U1.7 U1.8 Y1.2 Y2.1 Y2.4
HSE: TP55.1 Y1.3
I2C_SCL: TP50.1
I2C_SDA: TP49.1
ISO_5V: C36.1 U1.14 U3.7 U5.3
ISO_GND: C36.2 U1.9 U1.10 U1.11 U1.12 U1.15 U1.16 U3.4 U5.7
LP_DE: TP42.1
LP_RX: TP41.1
LP_TX: TP40.1
LSE_RTC: TP57.1 Y2.2
MEAS: U5.1
MISO_DE: TP45.1
MISO_RX: TP44.1
MISO_TX: TP43.1
MOSI_DE: TP48.1
MOSI_RX: TP47.1
MOSI_TX: TP46.1
NetC1_1: C1.1
NetC2_1: C2.1
NetC7_1: C7.1
NetC7_2: C7.2
NetC13_2: R11.2
NetC14_1: R11.1
NetC27_1: C27.1 C28.1 FB1.2
NetC31_1: U3.3
NetC32_1: U3.2 U3.6 U5.8
NetC35_RS-4851_1: C35_RS-4851.1 DD2_RS-4851.8 R30_RS-4851.1 R31_RS-4851.1
NetC35_RS-4851_2: C35_RS-4851.2 DD2_RS-4851.5 DD2_RS-4851.9 R33_RS-4851.2 R35_RS-4851.2 VD2_RS-4851.3
NetC35_RS-4852_1: C35_RS-4852.1 DD2_RS-4852.8 R30_RS-4852.1 R31_RS-4852.1
NetC35_RS-4852_2: C35_RS-4852.2 DD2_RS-4852.5 DD2_RS-4852.9 R33_RS-4852.2 R35_RS-4852.2 VD2_RS-4852.3
  other v1: 209.677,15.629 208.777,16.129 210.577,16.129 209.677,16.629
NetC35_RS-4853_1: C35_RS-4853.1 DD2_RS-4853.8 R30_RS-4853.1 R31_RS-4853.1
NetC35_RS-4853_2: C35_RS-4853.2 DD2_RS-4853.5 DD2_RS-4853.9 R33_RS-4853.2 R35_RS-4853.2 VD2_RS-4853.3
NetD2_1: 
NetD2_3: 
NetD2_6: U5.5
NetD2_8: U5.4
NetDD1_3: R9.2 R12.1
NetDD1_4: 
NetDD2_RS-4851_1: DD2_RS-4851.1 R30_RS-4851.2
NetDD2_RS-4851_2: DD2_RS-4851.2 DD2_RS-4851.3 R33_RS-4851.1
NetDD2_RS-4851_4: DD2_RS-4851.4
NetDD2_RS-4851_6: DD2_RS-4851.6 R32_RS-4851.1
NetDD2_RS-4851_7: DD2_RS-4851.7 R34_RS-4851.1
NetDD2_RS-4852_1: DD2_RS-4852.1 R30_RS-4852.2
NetDD2_RS-4852_2: DD2_RS-4852.2 DD2_RS-4852.3 R33_RS-4852.1
NetDD2_RS-4852_4: DD2_RS-4852.4
NetDD2_RS-4852_6: DD2_RS-4852.6 R32_RS-4852.1
NetDD2_RS-4852_7: DD2_RS-4852.7 R34_RS-4852.1
NetDD2_RS-4853_1: DD2_RS-4853.1 R30_RS-4853.2
NetDD2_RS-4853_2: DD2_RS-4853.2 DD2_RS-4853.3 R33_RS-4853.1
NetDD2_RS-4853_4: DD2_RS-4853.4
NetDD2_RS-4853_6: DD2_RS-4853.6 R32_RS-4853.1
NetDD2_RS-4853_7: DD2_RS-4853.7 R34_RS-4853.1
NetMP1_1: MP1.1 R5.1 R6.1 R7.1 R8.1
NetMP2_1: MP2.1 R5.2 R6.2 R7.2 R8.2
NetQ1_1: Q1.1 Q1.2 Q1.3 Q1.13 Q1.14 Q1.15
NetQ1_4: Q1.4 Q1.5 Q1.6 Q1.7 Q1.8 Q1.9 Q1.10 Q1.11
NetR19_1: U1.13
NetR20_2: U1.5
NetU5_6: U5.6
NRST: C21.1 PB1.2 R21.2 TP58.1
RCC_MCO: TP56.1
RS-485_D+_Main: R31_RS-4853.2 R32_RS-4853.2 VD2_RS-4853.1
RS-485_D+_Servise_IN: R31_RS-4852.2 R32_RS-4852.2 VD2_RS-4852.1
RS-485_D+_Servise_Loop: 
RS-485_D+_Servise_OUT: R31_RS-4851.2 R32_RS-4851.2 VD2_RS-4851.1
RS-485_D-_Main: R34_RS-4853.2 R35_RS-4853.1 VD2_RS-4853.2
RS-485_D-_Servise_IN: R34_RS-4852.2 R35_RS-4852.1 VD2_RS-4852.2
RS-485_D-_Servise_Loop: 
RS-485_D-_Servise_OUT: R34_RS-4851.2 R35_RS-4851.1 VD2_RS-4851.2
Service_Mode: C22.1 PB2.2 R25.2 TP59.1
SYS_SWCLK: TP52.1
SYS_SWDIO: TP51.1
USART_RX: TP54.1
USART_TX: TP53.1
V+: 
V-: U5.2
VDD_1: C23.1 C24.1 R22.1 R24.2
VDD_2: C25.1 C26.1 R23.1
VDDA: FB1.1 R24.1
VSS_1: C23.2 C24.2 C27.2 C28.2 R26.2
VSS_2: C25.2 C26.2 R27.2
pads on no net: Q1.12 U3.1 U3.5 U3.8 U3.9 U3.10 U3.11 U3.12 U3.13 U3.14 U3.15 U3.16
copper on no net:
  other v1: 1269.987,1269.087 1269.987,1269.087 1269.487,1269.987 1269.487,1269.987 1270.487,1269.987 1270.487,1269.987 1269.987,1270.887 1269.987,1270.887

## Silkscreen, mask and mechanical layers (free items; w line width, h text height)
Mechanical 1:
  circle w0.254: c22.5,37.5 r2.075
  circle w0.254: c22.5,12.5 r2.075
  circle w0.254: c42.5,12.5 r2.075
  circle w0.254: c42.5,37.5 r2.075
  lines w0.254: 0,0 50,0 50,50 0,50 0,0